# EAGLE board Production (EAGLE 7.1.0)
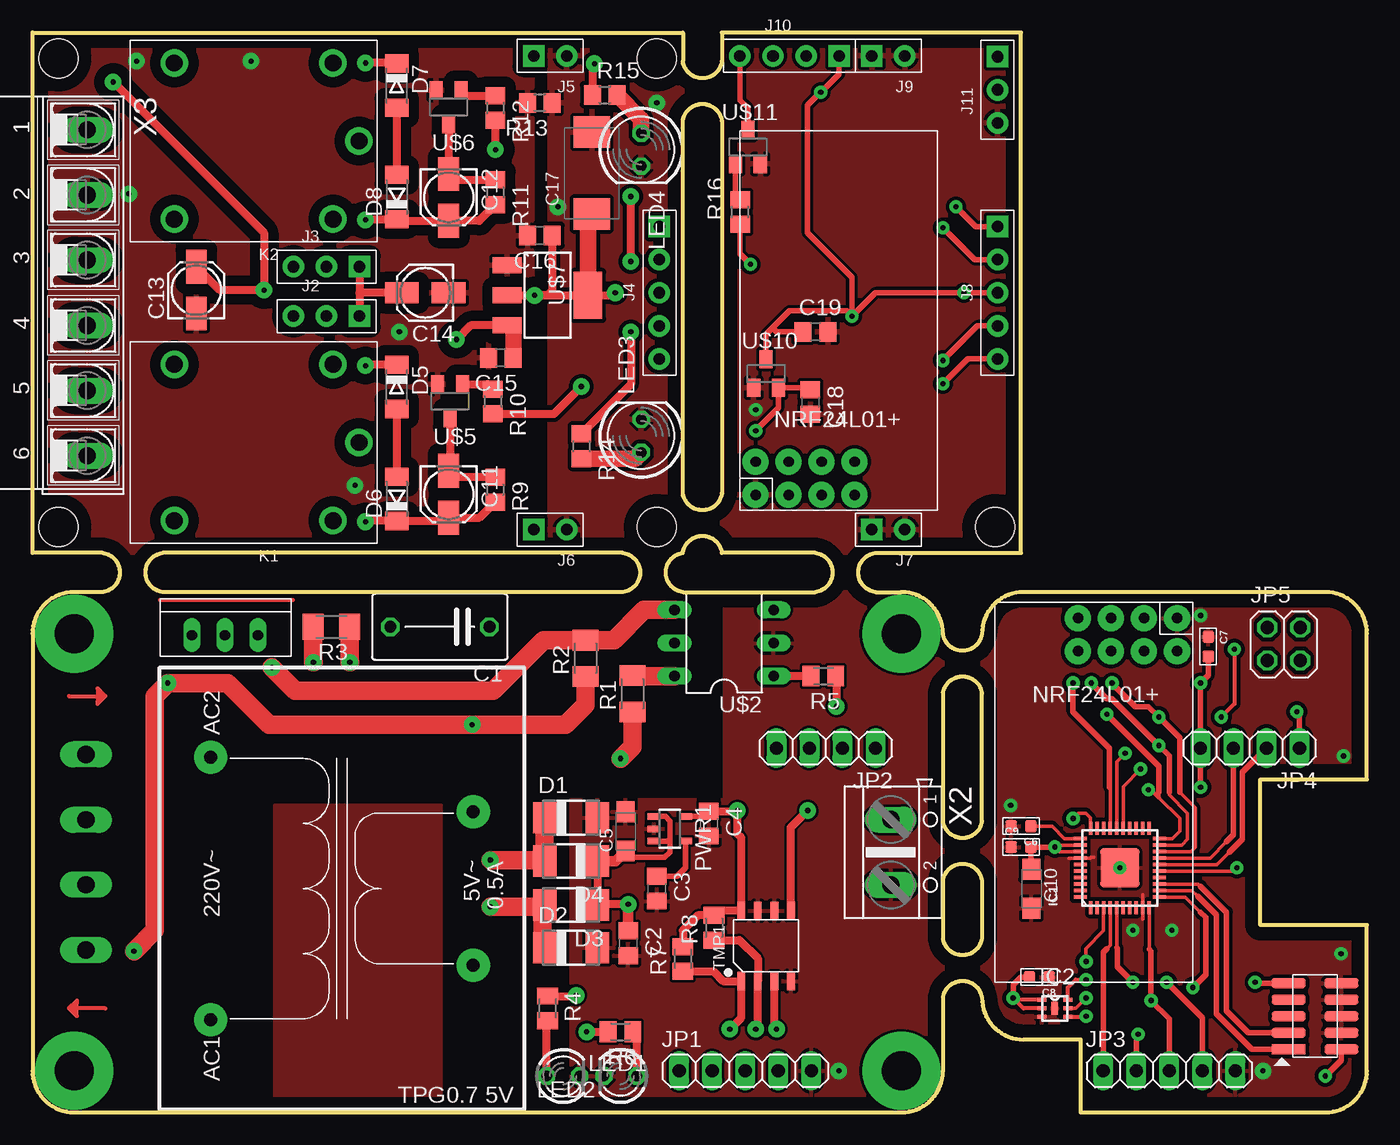
[diagram p0: board, top side]
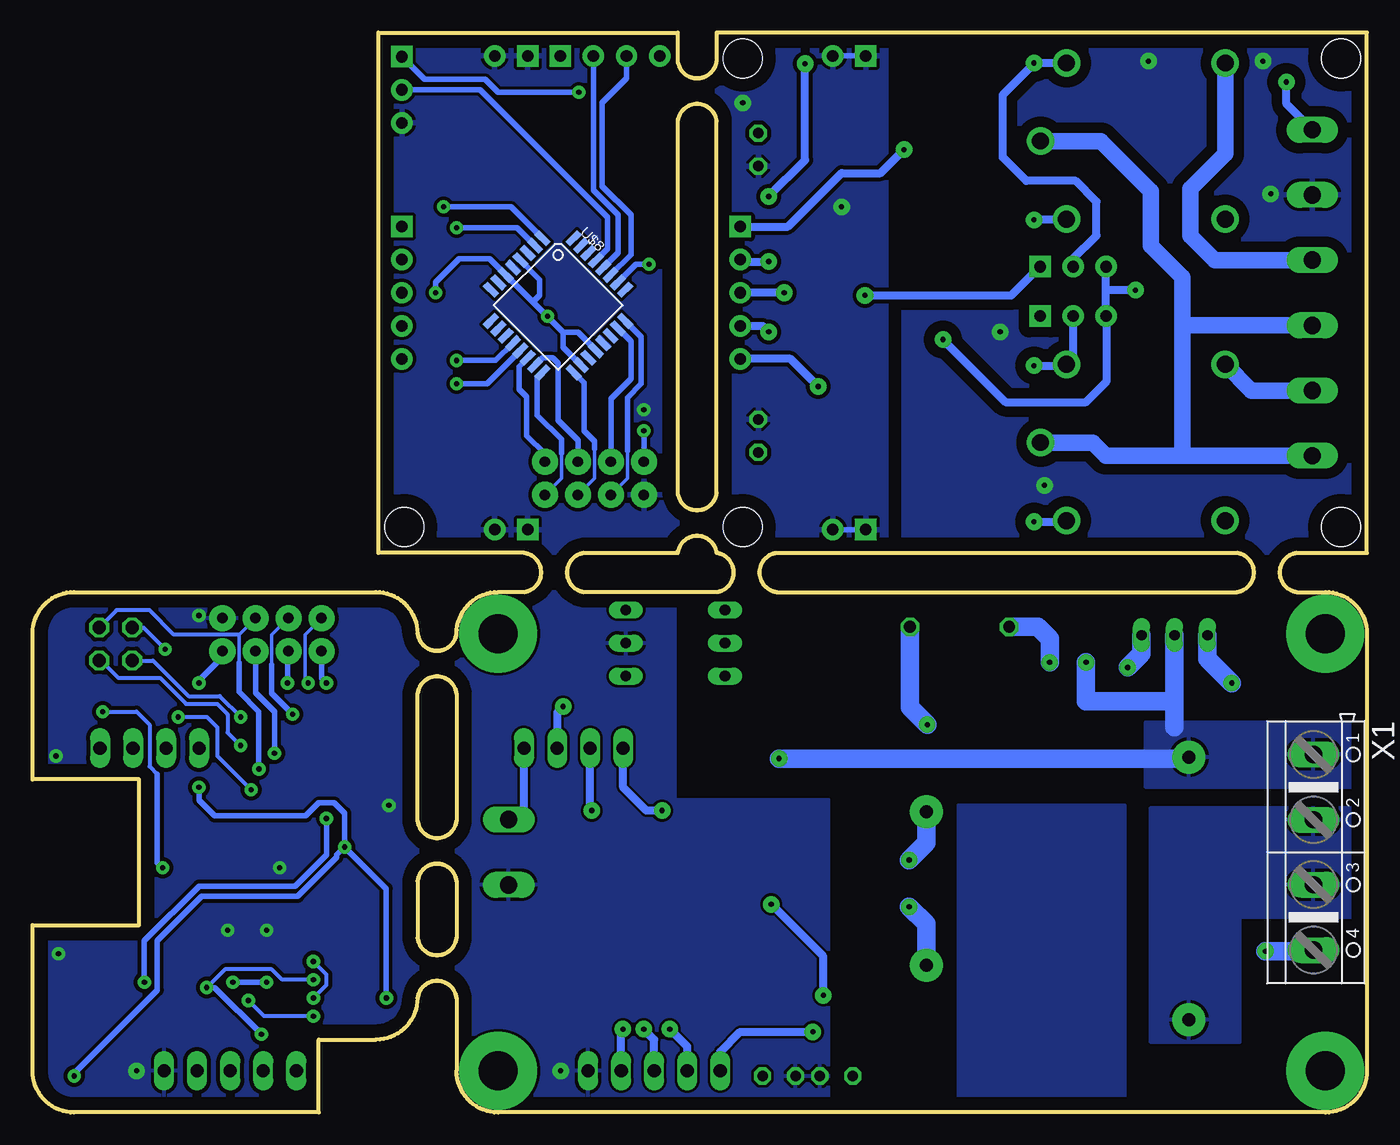
[diagram p1: board, bottom side, seen from below]

Size 102.6 x 83 mm. Coordinates in mm from the lower left corner, seen from the top.
Outline: 3.2,0 66.8,0 arc90 70,3.2 70,8.8 arc-165 73,8.8 arc90 76.2,5.6 80.6,5.6 80.6,0 99.4,0 arc90 102.6,3.2 102.6,14.4 94.4,14.4 94.4,25.6 102.6,25.6 102.6,36.8 arc90 99.4,40 76.2,40 arc90 73,36.8 arc-165 70,36.8 arc90 66.8,40 64.8,40 arc-165 64.8,43 76,43 76,83 53,83 53,80.8 arc-165 50,80.8 50,83 0,83 0,43 5.4,43 arc-165 5.4,40 3.2,40 arc90 0,36.8 0,3.2 arc90 3.2,0
Outline: 45.4,40 10,40 arc-165 10,43 45.4,43 arc-165 45.4,40
Outline: 70,17.8 arc-165 73,17.8 73,13.4 arc-165 70,13.4 70,17.8
Outline: 73,22.4 arc-165 70,22.4 70,32.2 arc-165 73,32.2 73,22.4
Outline: 50,40 arc-165 50,43 arc-165 53,43 60.2,43 arc-165 60.2,40 50,40
Outline: 50,76.2 arc-165 53,76.2 53,47.6 arc-165 50,47.6 50,76.2
Copper layers (1*16): Top 0.035mm / dielectric 1.5mm / Bottom 0.035mm
Design rules "default": minimum track width 10mil, minimum drill 24mil, track to track 8mil, track to pad 8mil, pad to pad 8mil, via to via 8mil, smd to smd 8mil, copper to edge 40mil, drill to drill 8mil, minimum pad ring 10mil, minimum via ring 8mil, stop-mask expansion 4mil, vias tented up to drill 0mil, thermal gap 10mil
Holes 3 mm at 2,81 48,81 48,45 2,45 74,45

## Footprints (pad centres in the part's own frame; a part is rotated, then mirrored left to right if it is on the bottom)
C075-052X106 = drill 0.914 octagon: 1 -3.81,0; 2 3.81,0
C0805 = smd 1.3 x 1.5: 1 -0.95,0; 2 0.95,0
SMC_A = smd 1.6 x 1.4: + -1.5,0; - 1.5,0
C0603 = smd 0.889 x 0.889: 1 0,0.762; 2 0,-0.762
153CLV-0405 = smd 2.6 x 1.6: + 1.8,0; - -1.8,0
SMC_D = smd 2.4 x 2.8: + -3.15,0; - 3.15,0
DO-214AC = smd 1.8 x 2.4: A 2.025,0; C -2.025,0
MINIMELF = smd 1.4 x 1.8: A 1.7,0; C -1.7,0
SOD80C = smd 1.4 x 1.8: A 1.7,0; C -1.7,0
QFN40-LONG = smd 1 x 0.26: 1 -3.05,2.25; 2 -3.05,1.75; 3 -3.05,1.25; 4 -3.05,0.75; 5 -3.05,0.25; 6 -3.05,-0.25; 7 -3.05,-0.75; 8 -3.05,-1.25; 9 -3.05,-1.75; 10 -3.05,-2.25; 21 3.05,-2.25; 22 3.05,-1.75; 23 3.05,-1.25; 24 3.05,-0.75; 25 3.05,-0.25; 26 3.05,0.25; 27 3.05,0.75; 28 3.05,1.25; 29 3.05,1.75; 30 3.05,2.25 | smd 0.26 x 1: 11 -2.25,-3.05; 12 -1.75,-3.05; 13 -1.25,-3.05; 14 -0.75,-3.05; 15 -0.25,-3.05; 16 0.25,-3.05; 17 0.75,-3.05; 18 1.25,-3.05; 19 1.75,-3.05; 20 2.25,-3.05; 31 2.25,3.05; 32 1.75,3.05; 33 1.25,3.05; 34 0.75,3.05; 35 0.25,3.05; 36 -0.25,3.05; 37 -0.75,3.05; 38 -1.25,3.05; 39 -1.75,3.05; 40 -2.25,3.05 | smd 3 x 3: 41 0,0
USON6 = smd 0.7 x 0.3: 1 -1,0.65; 2 -1,0; 3 -1,-0.65; 4 1,-0.65; 5 1,0; 6 1,0.65 | smd 0.5 x 1: EPAD 0,0
H2X5-SMD-1.27 = smd 0.74 x 2.6: 1 -2.54,2.025; 2 -2.54,-2.025; 3 -1.27,2.025; 4 -1.27,-2.025; 5 0,2.025; 6 0,-2.025; 7 1.27,2.025; 8 1.27,-2.025; 9 2.54,2.025; 10 2.54,-2.025
H3-2.54 = drill 0.889 pad 1.651 square: 1 0,2.54 | drill 0.889 pad 1.651: 2 0,0; 3 0,-2.54
H5-2.54 = drill 0.889 pad 1.651 square: 1 0,5.08 | drill 0.889 pad 1.651: 2 0,2.54; 3 0,0; 4 0,-2.54; 5 0,-5.08
H2-2.54 = drill 0.889 pad 1.651 square: 1 0,1.27 | drill 0.889 pad 1.651: 2 0,-1.27
H4-2.54 = drill 0.889 pad 1.651 square: 1 0,3.81 | drill 0.889 pad 1.651: 2 0,1.27; 3 0,-1.27; 4 0,-3.81
1X05 = drill 1.016 long: 1 -5.08,0; 2 -2.54,0; 3 0,0; 4 2.54,0; 5 5.08,0
1X04 = drill 1.016 long: 1 -3.81,0; 2 -1.27,0; 3 1.27,0; 4 3.81,0
2X02 = drill 1.016 octagon: 1 -1.27,-1.27; 2 -1.27,1.27; 3 1.27,-1.27; 4 1.27,1.27
REY5-19.0X15.0X15.0MM = drill 1.3 pad 2.1: 1 -8.1,0; 2 -6.1,-6; 3 -6.1,6; 4 6.1,-6; 5 6.1,6
LED3MM = drill 0.813 octagon: A -1.27,0; K 1.27,0
LED5MM = drill 0.813 octagon: A -1.27,0; K 1.27,0
SOT23-5 = smd 0.5 x 1: 1 -0.95,-1.2; 2 0,-1.2; 3 0.95,-1.2; 4 0.95,1.2; 5 -0.95,1.2
M1206 = smd 1.6 x 2: 1 -1.4,0; 2 1.4,0
M0805 = smd 1.3 x 1.6: 1 -0.95,0; 2 0.95,0
R0805 = smd 1.3 x 1.5: 1 -0.95,0; 2 0.95,0
SOIC8-1.27-5X4MM = smd 0.6 x 1.4: 1 -1.905,-2.7; 2 -0.635,-2.7; 3 0.635,-2.7; 4 1.905,-2.7; 5 1.905,2.7; 6 0.635,2.7; 7 -0.635,2.7; 8 -1.905,2.7
TPG-0.7-5V = drill 1 pad 2.54: AC1 6.9,-3.9; AC2 27.1,-3.9; DC1 11.1,-24.1; DC2 22.9,-24.1
DIL06 = drill 0.813 long: 1 -2.54,-3.81; 2 0,-3.81; 3 2.54,-3.81; 4 2.54,3.81; 5 0,3.81; 6 -2.54,3.81
TO220NORM = drill 0.8 long: GATE 2.54,0; MT1 -2.54,0; MT2 0,0
NRF = drill 0.8 pad 2: CE 3.74,1.2; CSN 3.74,3.74; GND 1.2,1.2; IRQ 8.82,3.74; MISO 8.82,1.2; MOSI 6.28,3.74; SCK 6.28,1.2; VCC 1.2,3.74
SOT23W = smd 1 x 1.4: D 0,1.303; G -0.95,-1.303; S 0.95,-1.303
SOT223 = smd 1.219 x 2.235: 1 -2.311,-3.099; 2 0,-3.099; 3 2.311,-3.099 | smd 3.6 x 2.2: 4 0,3.099
TQFP32-08 = smd 1.27 x 0.508: ADC6 4.5,-1.2; ADC7 4.5,1.2; AREF 4.5,-0.4; AVCC 4.5,-2; B5 4.5,-2.8; B6 -4.5,-2; B7 -4.5,-2.8; C0 4.5,2; C1 4.5,2.8; D3 -4.5,2.8; D4 -4.5,2; GND 4.5,0.4; GND1 -4.5,-0.4; GND2 -4.5,1.2; VCC -4.5,-1.2; VCC1 -4.5,0.4 | smd 0.508 x 1.27: B0 -0.4,-4.5; B1 0.4,-4.5; B2 1.2,-4.5; B3 2,-4.5; B4 2.8,-4.5; C2 2.8,4.5; C3 2,4.5; C4 1.2,4.5; C5 0.4,4.5; C6 -0.4,4.5; D0 -1.2,4.5; D1 -2,4.5; D2 -2.8,4.5; D5 -2.8,-4.5; D6 -2,-4.5; D7 -1.2,-4.5
SOT23 = smd 1 x 1.4: 1 -0.95,-1.1; 2 0.95,-1.1; 3 0,1.1
AK500/4 = drill 1.321 long: 1 -7.518,0; 2 -2.489,0; 3 2.489,0; 4 7.518,0
AK500/2 = drill 1.321 long: 1 -2.515,0; 2 2.515,0
AK500/6-H = drill 1.321 long: 1 -12.522,0; 2 -7.518,0; 3 -2.515,0; 4 2.515,0; 5 7.518,0; 6 12.522,0

## Placement (x,y rotation side)
C1  [C075-052X106]  31.32,37.32 180 top
C2  [C0805]  45.8,13 270 top
C3  [C0805]  48,17.2 270 top
C4  [C0805]  52,22.2 270 top
C5  [SMC_A]  45.6,21.6 90 top
C6  [C0603]  76,22 270 top
C7  [C0603]  90.4,35.8 0 top
C8  [C0603]  77.4,10.4 270 top
C9  [C0603]  76,20.4 90 top
C10  [SMC_A]  76.8,17.2 270 top
C11  [153CLV-0405]  32,47.51 270 top
C12  [153CLV-0405]  32,70.33 270 top
C13  [153CLV-0405]  12.6,63.2 90 top
C14  [153CLV-0405]  30.2,63 180 top
C15  [C0805]  36,58 180 top
C16  [C0805]  39,67.4 180 top
C17  [SMC_D]  43,72.2 90 top
C18  [C0805]  59.8,54.6 270 top
C19  [C0805]  60.2,60 0 top
D1  [DO-214AC]  41.4,22.65 0 top
D2  [DO-214AC]  41.4,12.65 0 top
D3  [DO-214AC]  41.4,15.95 180 top
D4  [DO-214AC]  41.4,19.32 180 top
D5  [MINIMELF]  28,55.76 270 top
D6  [SOD80C]  28,47.16 90 top
D7  [MINIMELF]  28,78.92 270 top
D8  [SOD80C]  28,70.36 90 top
IC1  CY8C4245-LQI-LONG  [QFN40-LONG]  83.6,18.8 90 top
IC2  OPT3001  [USON6]  78.6,8 0 top
J1  2x5p-1.27  [H2X5-SMD-1.27]  98.6,7.4 90 top
J2  3p-2.54  [H3-2.54]  22.6,61.2 270 top
J3  3p-2.54  [H3-2.54]  22.6,65 270 top
J4  5p-2.54  [H5-2.54]  48.2,63 0 top
J5  2p-2.54  [H2-2.54]  39.8,81.2 90 top
J6  2p-2.54  [H2-2.54]  39.8,44.8 90 top
J7  2p-2.54  [H2-2.54]  65.8,44.8 90 top
J8  5p-2.54  [H5-2.54]  74.2,63 0 top
J9  2p-2.54  [H2-2.54]  65.8,81.2 90 top
J10  4p-2.54  [H4-2.54]  58.2,81.2 270 top
J11  3p-2.54  [H3-2.54]  74.2,78.6 0 top
JP1  [1X05]  54.8,3.2 0 top
JP2  [1X04]  61,28 180 top
JP3  [1X05]  87.4,3.2 0 top
JP4  [1X04]  93.6,28 180 top
JP5  [2X02]  96.2,36 0 top
K1  HLS8L-DC5V-S-C  [REY5-19.0X15.0X15.0MM]  17,51.49 180 top
K2  HLS8L-DC5V-S-C  [REY5-19.0X15.0X15.0MM]  17,74.66 180 top
LED1  [LED3MM]  40.8,2.8 0 top
LED2  [LED3MM]  45.2,2.8 180 top
LED3  [LED5MM]  46.8,52 90 top
LED4  [LED5MM]  46.8,74 270 top
PWR1  LP2992  [SOT23-5]  49,21.8 270 top
R1  [M1206]  46.12,32.18 90 top
R2  [M1206]  42.52,34.9 90 top
R3  [M1206]  22.98,37.32 180 top
R4  [M0805]  39.6,8 270 top
R5  [M0805]  60.8,33.54 180 top
R6  [M0805]  45.2,6.2 180 top
R7  [M0805]  50,11.8 90 top
R8  [M0805]  52.4,14.2 90 top
R9  [R0805]  35.57,47.86 270 top
R10  [R0805]  35.39,54.64 270 top
R11  [R0805]  35.59,70.72 270 top
R12  [R0805]  35.59,77.2 270 top
R13  [R0805]  39,77.6 180 top
R14  [R0805]  42.2,51.2 270 top
R15  [R0805]  44,78.2 0 top
R16  [R0805]  54.4,69.2 90 top
TMP1  LM92  [SOIC8-1.27-5X4MM]  56.4,12.8 0 top
U$1  ТПГ-0.7-5V  [TPG-0.7-5V]  9.79,0.21 90 top
U$2  MOC3043  [DIL06]  53.17,36.08 90 top
U$3  BTB16  [TO220NORM]  14.8,36.68 0 top
U$4  NRF24  [NRF]  89.2,39.2 180 top
U$5  NSOT23  [SOT23W]  32.1,54.67 180 top
U$6  NSOT23  [SOT23W]  31.99,77.27 180 top
U$7  ASM1117  [SOT223]  39.6,62.8 270 top
U$8  ATMEGAN8  [TQFP32-08]  62.19,62.03 315 bottom
U$9  NRF24  [NRF]  54.39,46.27 0 top
U$10  XC6206_3.3  [SOT23]  56.4,56.8 0 top
U$11  NSOT23  [SOT23W]  55,74.2 0 top
X1  [AK500/4]  4.11,20 270 bottom
X2  [AK500/2]  65.99,20 270 top
X3  [AK500/6-H]  4.2,63 270 top

## Library data of the parts
C1-C5 C10-C19 R1-R16 = rcl
C6-C9 = My_RLC
D1-D8 = diode
IC1 = PsoC
IC2 PWR1 TMP1 = My_TI
J1 = Seeed-OPL-Connector; MPN: F243-1109A0BMUB2
J2 J3 J11 = Seeed-OPL-Connector; MPN: F185-1103A0BSYA1
J4 J8 = Seeed-OPL-Connector; MPN: F185-1105A0BSYA1
J5-J7 J9 = Seeed-OPL-Connector; MPN: F185-1102A1BSYA1
J10 = Seeed-OPL-Connector; MPN: F185-1104A1BSYA1
JP1-JP5 = pinhead
K1 K2 = Seeed-OPL-Relay; MPN: HLS8L-DC5V-S-C
LED1-LED4 = led
U$1 = Trasformators
U$2 = OpticalSwitch
U$3 = Semistors
U$4 U$9 = NRF24l01+
U$5 U$6 U$11 = Mosfet_Logic
U$7 U$10 = 74xx
U$8 = My Atmel
X1 X2 = con-ptr500; OC_FARNELL: unknown; OC_NEWARK: unknown
X3 = con-ptr500

## Nets
+3V3: C18.1 U$9.VCC U$10.2
+5V: C4.1 JP2.4 PWR1.5 R7.2 R8.2 TMP1.8
+5V1: C7.2 C8.2 C9.2 C10.+ IC1.32 IC1.33 IC2.1 IC2.2 J1.2 JP4.4 U$4.VCC
+5V2: C14.+ C16.1 C17.+ J2.1 J3.1 J4.3 U$7.2 U$7.4
+5V3: J10.1 J11.1
+12V: C13.+ C15.1 J2.3 J3.3 U$7.3 X3.1
AGND: C13.- C14.- C15.2 C16.2 R13.2 U$5.S U$6.S U$7.1 X3.2
BUTTON: IC1.15 JP4.1
CE: IC1.25 JP5.4 U$4.CE
CE1: U$8.C1 U$9.CE
CRIT_TEMP: IC1.5 JP3.4
CSN: IC1.26 U$4.CSN
CSN1: U$8.C0 U$9.CSN
GND: C2.2 C3.2 C4.2 C5.- D1.A D2.A JP1.5 LED1.K LED2.K PWR1.2 TMP1.4 TMP1.6 TMP1.7 U$2.2 X2.2
GND1: C6.2 C7.1 C8.1 C9.1 C10.- IC1.9 IC1.34 IC1.41 IC2.3 IC2.EPAD J1.4 J1.6 J1.8 J1.10 JP3.5 U$4.GND
GND2: C17.- J5.1 J5.2 J6.1 J6.2 LED3.K LED4.K R13.1
GND3: C18.2 C19.2 J7.1 J7.2 J9.1 J9.2 J11.3 U$8.GND U$8.GND1 U$8.GND2 U$9.GND U$10.1 U$11.S
IRQ: IC1.27 U$4.IRQ
IRQ1: U$8.B2 U$9.IRQ
LED: IC1.4 JP3.1
LED1: J4.4 R14.1
LED2: J4.2 R15.1
LOAD: JP2.2 R5.1
LOAD1: IC1.16 JP4.2
MISO: U$8.B4 U$9.MISO
MOSI: IC1.18 JP5.1 U$4.MOSI
MOSI1: U$8.B3 U$9.MOSI
N$1: U$1.AC1 X1.2 X1.3
N$2: R1.1 R3.2 U$1.AC2 U$3.MT2 X1.1
N$3: D1.C D4.A U$1.DC2
N$4: D2.C D3.A U$1.DC1
N$8: R1.2 U$2.6
N$9: R2.2 U$2.4 U$3.GATE
N$10: C1.1 R2.1 U$3.MT1 X1.4
N$11: C1.2 R3.1
N$13: LED1.A R4.2
N$14: R5.2 U$2.1
N$16: C3.1 PWR1.4
N$17: JP1.1 R6.2
N$18: LED2.A R6.1
N$19: JP1.2 R7.1 TMP1.1
N$20: JP1.3 R8.1 TMP1.2
N$21: JP1.4 TMP1.3
N$23: JP2.1 X2.1
N$24: C6.1 IC1.31
N$25: IC1.12 J1.1
N$26: IC1.13 J1.3
N$27: D5.C J2.2 K1.2
N$28: C11.+ D6.C K1.3 R9.2
N$29: D5.A D6.A
N$30: C11.- R9.1 U$5.D
N$31: R10.1 U$5.G
N$32: D7.C J3.2 K2.2
N$33: C12.+ D8.C K2.3 R11.2
N$34: D7.A D8.A
N$35: C12.- R11.1 U$6.D
N$36: R12.1 U$6.G
N$37: K1.4 X3.5
N$38: K1.1 K2.1 X3.4 X3.6
N$39: K2.4 X3.3
N$40: LED3.A R14.2
N$41: LED4.A R15.2
N$42: C19.1 J8.3 U$8.AREF U$8.AVCC U$8.VCC U$8.VCC1 U$10.3
N$43: J8.5 U$8.B1
N$44: J8.4 U$8.B0
N$45: J8.1 U$8.D3
N$46: J8.2 U$8.D4
N$47: J10.2 U$8.C5
N$48: J10.3 U$8.C4
N$49: J10.4 U$11.D
N$50: R16.2 U$11.G
N$51: R16.1 U$8.C3
N$52: J11.2 U$8.C6
NISO: IC1.19 JP5.3 U$4.MISO
OPT_IRQ: IC1.3 IC2.5
REL1: J4.5 R10.2
REL2: J4.1 R12.2
RESET: IC1.30 J1.9
SCL: IC1.10 IC2.4 JP3.3
SCLK: IC1.20 JP5.2 U$4.SCK
SCLK1: U$8.B5 U$9.SCK
SDA: IC1.11 IC2.6 JP3.2
TEMP_INT: JP2.3 TMP1.5
TEMP_INT1: IC1.17 JP4.3
VCC: C2.1 C5.+ D3.C D4.C PWR1.1 PWR1.3 R4.1

## Tracks (layer width: path | path; a pad name or v marks a point on that pad's centre or on a via)
+3V3  (via drill 0.4 pad 1.02)
  Top 0.406: v55.6,52.4 57.35,54.15 U$10.2 59.65,55.7 C18.1
  Bottom 0.406: v55.6,52.4 U$9.VCC
+5V  (via drill 0.4 pad 1.27)
  Top 0.406: PWR1.5 51.6,22.75 C4.1
  Top 0.61: C4.1 54.15,23.15 v54.2,23.2 54.2,21.4 54.49,21.11 TMP1.8 52.75,15.5 R8.2 51.15,15.15 50,14 R7.2
  Bottom 0.61: v54.2,23.2 55.4,23.2 57.19,24.99 JP2.4
+5V1  (via drill 0.4 pad 1.02)
  Top 0.254: IC1.32 78.75,20.55 v78.6,20.4 78.95,20.05 IC1.33
  Top 0.305: IC2.1 75.55,8.65 v75.4,8.8 76.2,8 IC2.2
  Top 0.406: 100.6,4.83 J1.2 100.62,4.03 v99.4,2.8 | v89.8,25 v89.79,25.01 JP4.4 v89.8,33 90.4,33.6 C7.2 | v78.6,20.4 C9.2 76.76,18.74 C10.+ | C8.2 76,10.4 75.4,9.8 v75.4,8.8
  Bottom 0.406: v75.4,8.8 75.4,17.2 v78.6,20.4 | v78.6,20.4 78.6,23 79.4,23.8 80.6,23.8 81.6,22.8 88.6,22.8 89.8,24 v89.8,25 | v99.4,2.8 99.4,3 93,9.4 93,13.2 89.6,16.6 82.2,16.6 79.2,19.6 79.2,19.8 v78.6,20.4 | U$4.VCC 88,35 89.8,33.2 v89.8,33
+5V2  (via drill 0.4 pad 1.27)
  Top 0.61: J3.1 25.14,63 | 25.14,63 J2.1 | C14.+ 25.14,63 | U$7.2 v38.6,62.8 | v44.8,63 44.6,62.8 U$7.4 v38.6,62.8 | C16.1 39.95,63.15 39.6,62.8 v38.6,62.8
  Top 1.27: C17.+ 42.7,68.75 U$7.4
  Bottom 0.61: v38.6,62.8 27.34,62.8 J3.1 | v44.8,63 J4.3
+5V3  (via drill 0.4 pad 1.02)
  Top 0.406: v60.6,78.4 62.01,79.81 J10.1
  Bottom 0.406: J11.1 72.46,79.4 67.8,79.4 66.8,78.4 v60.6,78.4
+12V  (via drill 0.4 pad 1.27)
  Top 0.61: v6.2,79.2 17.8,67.6 v17.8,63.2 14.4,63.2 C13.+ | U$7.3 33.69,60.49 v32.6,59.4
  Top 1.27: C15.1 37,58.05 37,60.4 36.91,60.49 U$7.3
  Bottom 0.61: 20.06,63.2 J2.3 20,61.14 20,56.2 21.6,54.6 27.8,54.6 v32.6,59.4 | 20.06,63.2 J3.3 | X3.1 6.2,77.52 v6.2,79.2 | v17.8,63.2 20.06,63.2
AGND  (via drill 0.4 pad 1.27)
  other vias: 7.4,70.6 24.8,48.2 28.2,60 8,80.8 16.8,80.8
  pour Top (isolate 0.813): 0,43 0,83 38.4,83 38.4,43
  pour Bottom (isolate 0.813): 35.6,43 35.6,83 0,83 0,43
BUTTON  (via drill 0.4 pad 1.02)
  Top 0.254: v92.6,18.8 92.35,18.55 IC1.15
  Top 0.406: JP4.1 97.41,30.59 v97.2,30.8
  Bottom 0.305: v97.2,30.8 94.6,30.8 93.6,29.8 93.6,26.6 93,26
  Bottom 0.406: 93,26 93,19.2 v92.6,18.8
CE  (via drill 0.4 pad 1.02)
  Top 0.254: IC1.25 83.85,25.05 v85.2,26.4
  Bottom 0.254: 86.73,34.55 86.73,36.73 U$4.CE
  Bottom 0.305: 86.73,36.73 91.73,36.73 93.6,38.6 96.14,38.6 JP5.4
  Bottom 0.406: v85.2,26.4 85.2,30.8 86.73,32.33 86.73,34.55
CE1
  Bottom 0.254: 56.86,50.84 56.86,48.74 U$9.CE
  Bottom 0.406: U$8.C1 55.8,59.6 55.8,56 56.86,54.94 56.86,50.84
CRIT_TEMP  (via drill 0.4 pad 1.02)
  Top 0.254: 83.35,12.65 IC1.5
  Top 0.406: JP3.4 89.94,7.26 v87.2,10 | v84.6,10 83.4,11.2 83.4,12.6 83.35,12.65
  Bottom 0.406: v87.2,10 v84.6,10
CSN  (via drill 0.4 pad 1.02)
  Top 0.254: IC1.26 83.35,26.95 v84,27.6
  Bottom 0.406: v84,27.6 84,30.8 85.46,32.26 U$4.CSN
CSN1
  Bottom 0.406: U$9.CSN 58.13,54.87 56.6,56.4 56.6,59.27 U$8.C0
GND  (via drill 0.4 pad 1.27)
  other vias: 62,3.2
  pour Top: 70,0 70,40 53.2,40 53.2,24 41.4,24 41.4,0
  pour Bottom: 41.4,0 41.4,24 53.2,24 53.2,40 70,40 70,0
GND1  (via drill 0.4 pad 1.02, 0.4 pad 1.27)
  Top 0.254: 79.68,19.55 IC1.34 81.32,19.55 81.37,19.6 81.6,19.6 | 85.35,14.85 85.35,15.72 IC1.9 85.35,16.72
  other vias: 94.6,3.2 83.6,18.8 75.2,23.6 89.8,38.2 87.6,14 84.6,14 100.6,12.2 100.8,27.4
  pour Top (isolate 0.305): 102.6,0 102.6,40 73,40 73,0
  pour Bottom (isolate 0.305): 73,0 73,40 102.6,40 102.6,0
GND2  (via drill 0.4 pad 1.27)
  Bottom 0.406: J6.1 J6.2 | J5.1 J5.2
  other vias: 48,77.6 40.4,69.6
  pour Top (isolate 0.305): 50,43 39.8,43 39.8,83 50,83
  pour Bottom (isolate 0.305): 37,43 50,43 50,83 37,83
GND3  (via drill 0.4 pad 1.02)
  other vias: 55.6,54
  pour Top (isolate 0.254): 53,83 76,83 76,43 53,43
  pour Bottom (isolate 0.254): 76,83 53,83 53,43 76,43
IRQ  (via drill 0.4 pad 1.02)
  Top 0.254: IC1.27 82.85,24.95 82.8,25
  Top 0.406: 82.8,25 82.8,28 80,30.8 v80,33
  Bottom 0.406: v80,33 80.38,33.38 U$4.IRQ
IRQ1
  Bottom 0.406: U$8.B2 65.2,57.33 65.2,55.6 64.6,55 64.6,52 63.21,50.61 U$9.IRQ
LED
  Top 0.254: 82.6,12.6 82.85,12.85 IC1.4
  Top 0.406: JP3.1 82.32,12.32 82.6,12.6
LED1  (via drill 0.4 pad 1.27)
  Top 0.61: v46,60 46,55.95 R14.1
  Bottom 0.61: J4.4 46.46,60.46 v46,60
LED2  (via drill 0.4 pad 1.27)
  Top 0.61: v46,65.4 v46,70.4 | v43.2,80.6 43.05,80.45 R15.1
  Bottom 0.61: J4.2 48.06,65.4 v46,65.4 | v46,70.4 43.2,73.2 v43.2,80.6
LOAD  (via drill 0.4 pad 1.27)
  Top 0.61: R5.1 61.8,33.49 v61.8,31.2
  Bottom 0.61: v61.8,31.2 62.27,30.73 JP2.2
LOAD1
  Top 0.254: IC1.16 91.05,19.05 92,20
  Top 0.406: 92,20 93,21 93,26.13 JP4.2
MISO
  Bottom 0.254: U$9.MISO 61.94,48.74 61.94,50.66
  Bottom 0.406: 61.94,50.66 61.94,51.74 63.8,53.6 63.8,56.46 U$8.B4
MOSI  (via drill 0.4 pad 1.02)
  Top 0.254: IC1.18 89.05,20.05 89.4,20.4 89.4,23.4 88.2,24.6
  Top 0.406: 88.2,24.6 88.2,28.8 v86.6,30.4 85.8,31.2 84.8,31.2 v83,33
  Bottom 0.305: JP5.1 93.33,34.73 90.6,32 88.2,32 v86.6,30.4
  Bottom 0.406: v83,33 83,35.38 U$4.MOSI
MOSI1
  Bottom 0.406: U$9.MOSI 60.67,51.67 62.2,53.2 62.2,57.6 62.6,58 63.39,58 U$8.B3
N$1
  pour Bottom: 0,23.4 0,15 9.8,15 9.8,5.4 16.6,5.4 16.6,23.4
N$2  (via drill 0.4 pad 1.27)
  Top 1.422: R3.2 21.58,34.62 v21.6,34.6 | R1.1 46.12,28.12 v45.2,27.2
  Bottom 1.422: U$3.MT2 14.8,31.4 | 14.8,31.4 14.8,29.6 | v21.6,34.6 21.6,31.6 15,31.6 14.8,31.4 | v45.2,27.2 13.8,27.2 U$1.AC2
  pour Bottom: 0,30 0,25 17,25 17,30
N$3  (via drill 0.4 pad 1.27)
  Top 1.422: v35.2,19.4 39.3,19.4 D4.A D1.C
  Bottom 1.422: U$1.DC2 33.89,20.71 v35.2,19.4
N$4  (via drill 0.4 pad 1.27)
  Top 1.422: v35.2,15.8 39.23,15.8 | 39.23,15.8 D3.A | 39.23,15.8 39.23,12.8 D2.C
  Bottom 1.422: U$1.DC1 33.89,14.49 v35.2,15.8
N$5  (via drill 3 pad 6)
  other vias: 3.2,36.8
N$6  (via drill 3 pad 6)
  other vias: 3.2,3.2
N$7  (via drill 3 pad 6)
  other vias: 66.8,36.8
N$8
  Top 1.422: U$2.6 46.16,33.54 R1.2
N$9  (via drill 0.4 pad 1.27)
  Top 1.422: v18.4,34.2 20.2,32.4 35.4,32.4 39.3,36.3 R2.2 44.7,36.3 47.02,38.62 U$2.4
  Bottom 1.422: U$3.GATE 17.34,35.26 v18.4,34.2
N$10  (via drill 0.4 pad 1.27)
  Top 1.422: v7.8,12.4 9.4,14 9.4,32 v10.4,33 15,33 18.2,29.8 v33.8,29.8 41,29.8 42.52,31.32 R2.1
  Bottom 1.422: U$3.MT1 12.26,34.86 v10.4,33 | v7.8,12.4 4.19,12.4 X1.4 | C1.1 35.13,31.13 v33.8,29.8
N$11  (via drill 0.4 pad 1.27)
  Top 1.422: R3.1 24.38,34.62 v24.4,34.6
  Bottom 1.422: v24.4,34.6 24.4,36.4 25.32,37.32 C1.2
N$12  (via drill 3 pad 6)
  other vias: 66.8,3.2
N$13
  Top 0.61: LED1.A 39.53,6.98 R4.2
N$14
  Top 0.61: R5.2 U$2.1
N$15
  pour Top: 18.6,23.6 31.4,23.6 31.4,0.2 18.6,0.2
  pour Bottom: 31.4,23.6 18.6,23.6 18.6,0.2 31.4,0.2
N$16
  Top 0.406: PWR1.4 50.2,18.8 49.55,18.15 C3.1
N$17  (via drill 0.4 pad 1.27)
  Top 0.61: v42.6,6.2 R6.2
  Bottom 0.61: JP1.1 49.72,4.68 48.2,6.2 v42.6,6.2
N$18
  Top 0.61: LED2.A 46.47,5.88 R6.1
N$19  (via drill 0.4 pad 1.27)
  Top 0.61: v53.6,6.4 54.49,7.29 TMP1.1 53.1,10.1 52.35,10.85 R7.1
  Bottom 0.61: JP1.2 52.26,5.06 v53.6,6.4
N$20  (via drill 0.4 pad 1.27)
  Top 0.61: v55.6,6.4 55.77,6.57 TMP1.2 55.77,11.84 54.35,13.25 R8.1
  Bottom 0.61: JP1.3 54.8,5.6 v55.6,6.4
N$21  (via drill 0.4 pad 1.27)
  Top 0.61: v57.2,6.4 57.03,6.57 TMP1.3
  Bottom 0.61: JP1.4 57.34,6.26 v57.2,6.4
N$22
  Top 0.305: 9.8,39.4 20,39.4
N$23
  Bottom 0.61: X2.1 64.89,22.52 64.8,22.6 JP2.1
N$24
  Top 0.254: IC1.31 79.35,21.05 78.4,22 C6.1
N$25
  Top 0.254: 89.6,16.6 89.15,17.05 IC1.12
  Top 0.406: J1.1 93.74,4.86 91,7.6 91,15.2 89.6,16.6
N$26
  Top 0.254: 89.8,17.4 89.65,17.55 IC1.13
  Top 0.406: J1.3 93.47,6.13 91.8,7.8 91.8,15.4 89.8,17.4
N$27  (via drill 0.4 pad 1.27)
  Top 0.61: D5.C 25.86,57.46 v25.6,57.4
  Bottom 0.61: J2.2 22.6,57.99 K1.2 23.19,57.4 v25.6,57.4
N$28  (via drill 0.4 pad 1.27)
  Top 0.61: v25.6,45.4 25.86,45.46 D6.C 31.79,45.46 C11.+ 34.37,45.71 R9.2
  Bottom 0.61: v25.6,45.4 23.19,45.4 K1.3
N$29
  Top 0.61: D5.A 27.99,48.88 D6.A
N$30
  Top 0.61: U$5.D 32.1,49.37 C11.- 32.54,48.81 R9.1
N$31
  Top 0.61: U$5.G 35.01,55.97 R10.1
N$32  (via drill 0.4 pad 1.27)
  Top 0.61: D7.C 27.96,80.66 v25.6,80.66
  Bottom 0.61: J3.2 22.6,65.6 20.8,67.4 20.8,70 22.4,71.6 26.2,71.6 28,73.4 28,78.2 25.54,80.66 v25.6,80.66 K2.2
N$33  (via drill 0.4 pad 1.27)
  Top 0.61: v25.6,68.6 25.66,68.66 D8.C 28.13,68.53 31.4,68.53 C12.+ 34.35,68.53 R11.2
  Bottom 0.61: K2.3 23.16,68.6 v25.6,68.6
N$34
  Top 0.61: D7.A D8.A
N$35
  Top 0.61: R11.1 32.46,71.67 C12.- 32,75.96 U$6.D
N$36
  Top 0.61: U$6.G 33.36,78.15 R12.1
N$37
  Bottom 1.27: X3.5 8.89,55.48 K1.4
N$38
  Bottom 1.27: K2.1 20.46,74.66 16.6,70.8 16.6,66.6 14.2,64.2 14.2,60.6 | 8.29,60.48 X3.4 14.09,60.48 14.2,60.6 | X3.6 14.2,50.48 | 14.2,50.48 20.08,50.48 21.09,51.49 K1.1 | 14.2,60.6 14.2,50.48
N$39
  Bottom 1.27: X3.3 11.71,65.52 13.6,67.4 13.6,71 10.9,73.7 K2.4
N$40
  Top 1.27: LED3.A 46.32,50.25 R14.2
N$41
  Top 1.27: R15.2 46.8,76.35 LED4.A
N$42  (via drill 0.4 pad 1.02)
  Top 0.406: J8.3 v71.6,63 64.8,63 v63,61.2 | U$10.3 56.4,59.8 56.9,60.3 | v63,61.2 63,64.2 59.6,67.6 59.6,77.4 62,79.8 62,81.2 | C19.1 57.2,60 56.9,60.3 | 56.9,60.3 58.2,61.6 62.6,61.6 v63,61.2
  Bottom 0.406: 64.23,62.37 U$8.VCC 67.45,65.6 69.8,65.6 71.6,63.8 v71.6,63 | 64.23,62.37 61.8,59.95 | 61.8,59.95 61.8,58.81 U$8.AVCC | U$8.AREF 60.67,59.95 61.8,59.95 | U$8.VCC1 63.6,64.01 63.6,62.8 64.03,62.37 64.23,62.37
N$43  (via drill 0.4 pad 1.02)
  Top 0.406: J8.5 71.92,57.92 v70,56
  Bottom 0.406: v70,56 67.66,56 U$8.B1
N$44  (via drill 0.4 pad 1.02)
  Top 0.406: J8.4 72.66,60.46 v70,57.8
  Bottom 0.406: v70,57.8 66.99,57.8 U$8.B0
N$45  (via drill 0.4 pad 1.02)
  Top 0.406: J8.1 72.52,68.08 v71,69.6
  Bottom 0.406: v71,69.6 65.8,69.6 U$8.D3
N$46  (via drill 0.4 pad 1.02)
  Top 0.406: J8.2 72.46,65.54 v70,68
  Bottom 0.406: v70,68 65.33,68 U$8.D4
N$47
  Bottom 0.406: U$8.C5 57.6,66.06 57.6,69 59.47,70.87 J10.2
N$48
  Bottom 0.406: J10.3 56.93,79.47 58.8,77.6 58.8,71.2 56.6,69 56.6,65.92 U$8.C4
N$49
  Top 0.406: J10.4 54.39,77.81 55,77.2 U$11.D
N$50
  Top 0.406: U$11.G 54.05,70.5 R16.2
N$51  (via drill 0.4 pad 1.02)
  Top 0.406: v55.2,65.2 54.4,66 R16.1
  Bottom 0.406: U$8.C3 56.19,65.2 v55.2,65.2
N$52
  Bottom 0.406: U$8.C6 58.4,66.39 58.4,68.8 68.2,78.6 J11.2
NISO  (via drill 0.4 pad 1.02)
  Top 0.254: IC1.19 88.35,20.55 88.8,21 88.8,23 87.4,24.4 87.4,24.6
  Top 0.406: 87.4,24.6 87.4,27.4 v86.6,28.2 83,31.8 82.6,31.8 v81.4,33
  Bottom 0.254: U$4.MISO 81.65,36.73 81.65,33.25 v81.4,33
  Bottom 0.305: JP5.3 97.33,34.73 96,33.4 92.8,33.4 90.8,31.4 88.4,31.4 87.6,30.6 87.6,29.2 v86.6,28.2
OPT_IRQ  (via drill 0.4 pad 1.02)
  Top 0.254: IC1.3 82.35,13.95 81,12.6 v81,11.6 | IC2.5 80.2,8 v81,8.8
  Bottom 0.305: v81,8.8 80,9.8 80,10.6 v81,11.6
REL1  (via drill 0.4 pad 1.27)
  Top 0.61: R10.2 40.09,53.69 v42.2,55.8
  Bottom 0.61: v42.2,55.8 44.32,57.92 J4.5
REL2  (via drill 0.4 pad 1.27)
  Top 0.61: v35.6,74 R12.2
  Bottom 0.61: J4.1 44.52,68.08 40.4,72.2 37.4,72.2 v35.6,74
RESET  (via drill 0.4 pad 1.02)
  Top 0.254: IC1.30 81.35,22.65 81,23 80.4,23 v80,22.6
  Top 0.406: J1.9 94.06,9.94 v94,10
  Bottom 0.406: v80,22.6 80,19.8 82.4,17.4 89.8,17.4 94,13.2 v94,10
S$1
  Top 0.305: 2.8,32 5.6,32 | 5.6,32 5,31.4 5,31.6 | 5.6,32 5,32.6 5,31.6 | 5,31.6 5.2,31.8 5.2,32.2
S$2
  Top 0.305: 5.6,8 2.8,8 | 2.8,8 3.4,8.6 3.4,8.4 | 2.8,8 3.4,7.4 3.4,8.4 | 3.4,8.4 3.2,8.2 3.2,7.8
SCL  (via drill 0.4 pad 1.02)
  Top 0.254: 85.85,12.55 IC1.10
  Top 0.305: IC2.4 80.95,7.35 v81,7.4
  Top 0.406: JP3.3 87.4,7.2 v86,8.6 86,12.4 85.85,12.55
  Bottom 0.305: v81,7.4 84.8,7.4 v86,8.6
SCLK  (via drill 0.4 pad 1.02)
  Top 0.254: IC1.20 87.65,21.05 88.2,21.6 88.2,22.6 86.6,24.2 86.6,24.6
  Top 0.305: v92.4,35.6 92.4,31.4 v91.4,30.4 | v85.8,24.8 86,24.8 86.6,24.2
  Top 0.406: 86.6,24.6 86.6,26.6 v82.6,30.6
  Bottom 0.254: 84.2,34.4 84.2,36.72 U$4.SCK
  Bottom 0.305: JP5.2 94.07,37.27 v92.4,35.6 | v91.4,30.4 89.2,30.4 88.4,29.6 88.4,27.4 v85.8,24.8
  Bottom 0.406: v82.6,30.6 84.2,32.2 84.2,34.4
SCLK1
  Bottom 0.254: 59.4,51 59.4,48.74 U$9.SCK
  Bottom 0.406: U$8.B5 60.2,56.08 60.2,52.4 59.4,51.6 59.4,51
SDA  (via drill 0.4 pad 1.02)
  Top 0.254: IC1.11 88.65,16.55 89.8,15.4
  Top 0.305: IC2.6 79.6,9.6 80.2,10.2 v81,10.2
  Top 0.406: 89.8,15.4 90.2,15 90.2,10.6 v89.2,9.6 | v85,6 84.86,5.86 JP3.2
  Bottom 0.305: v81,10.2 83.4,10.2 84.2,11 87.8,11 v89.2,9.6
  Bottom 0.406: v89.2,9.6 88.6,9.6 v85,6
TEMP_INT  (via drill 0.4 pad 1.27)
  Top 0.61: TMP1.5 58.3,21.91 v59.6,23.2
  Bottom 0.61: v59.6,23.2 59.73,23.33 JP2.3
TEMP_INT1
  Top 0.254: IC1.17 90.55,19.55 91.8,20.8
  Top 0.406: 91.8,20.8 92.33,21.33 JP4.3
VCC  (via drill 0.4 pad 1.27)
  Top 0.406: PWR1.1 48.65,22.75 49,22.4 49,21 | 49,21 49,20 48.6,19.6 46.1,19.6 C5.+ | PWR1.3 48.85,20.85 49,21
  Top 0.61: D4.C D3.C 43.48,16 v45.8,16 | R4.1 41.75,8.95 v41.8,9
  Top 0.813: C2.1 v45.8,16 | D4.C 44.82,19.32 C5.+
  Bottom 0.61: v41.8,9 41.8,12 v45.8,16